# EAGLE board zeta2 (EAGLE 9.0.1)

Size 101.27 x 85.08 mm. Coordinates in mm from the lower left corner, seen from the top.
Outline: 0,0 101.27,0 101.27,85.08 0,85.08 0,0
Copper layers (1*16): Top 0.035mm / dielectric 1.5mm / Bottom 0.035mm
Design rules "default": minimum track width 6mil, minimum drill 0.35mm, track to track 6mil, track to pad 6mil, pad to pad 6mil, via to via 6mil, smd to smd 6mil, copper to edge 40mil, drill to drill 6mil, minimum pad ring 10mil, minimum via ring 8mil, stop-mask expansion 4mil, vias tented up to drill 0mil, thermal gap 10mil

## Footprints (pad centres in the part's own frame; a part is rotated, then mirrored left to right if it is on the bottom)
JST_B2B-PH_HEADER = drill 0.8 long: P1 1.075,0.048; P2 -0.925,0.048
JST_B3B-PH_HEADER = drill 0.8 long: P1 2.027,0.048; P2 0.028,0.048; P3 -1.972,0.048
C0603 = smd 1.1 x 1: 1 -0.85,0; 2 0.85,0
SMC_C = smd 2.4 x 2.4: + -2.5,0; - 2.5,0
SMC_A = smd 1.6 x 1.4: + -1.5,0; - 1.5,0
SOD80C = smd 1.4 x 1.8: A 1.7,0; C -1.7,0
MELF-MLL41 = smd 2.5 x 3: A 2.625,0; C -2.625,0
JST_B4B-PH_HEADER = drill 0.8 long: P1 2.98,0.048; P2 0.98,0.048; P3 -1.02,0.048; P4 -3.02,0.048
SOT23 = smd 1 x 1.4: 1 -0.95,-1.1; 2 0.95,-1.1; 3 0,1.1
SO20 = smd 0.6 x 2.2: 1 -5.715,-4.6; 2 -4.445,-4.6; 3 -3.175,-4.6; 4 -1.905,-4.6; 5 -0.635,-4.6; 6 0.635,-4.6; 7 1.905,-4.6; 8 3.175,-4.6; 9 4.445,-4.6; 10 5.715,-4.6; 11 5.715,4.6; 12 4.445,4.6; 13 3.175,4.6; 14 1.905,4.6; 15 0.635,4.6; 16 -0.635,4.6; 17 -1.905,4.6; 18 -3.175,4.6; 19 -4.445,4.6; 20 -5.715,4.6
SO16 = smd 0.66 x 2.032: 1 -4.445,-3.073; 2 -3.175,-3.073; 3 -1.905,-3.073; 4 -0.635,-3.073; 5 0.635,-3.073; 6 1.905,-3.073; 7 3.175,-3.073; 8 4.445,-3.073; 9 4.445,3.073; 10 3.175,3.073; 11 1.905,3.073; 12 0.635,3.073; 13 -0.635,3.073; 14 -1.905,3.073; 15 -3.175,3.073; 16 -4.445,3.073
SO-08 = smd 0.6 x 2.2: 1 -1.905,-2.6; 2 -0.635,-2.6; 3 0.635,-2.6; 4 1.905,-2.6; 5 1.905,2.6; 6 0.635,2.6; 7 -0.635,2.6; 8 -1.905,2.6
SOT-23 = smd 0.787 x 0.889: 1 0.025,-1.016; 2 -0.94,1.016; 3 0.991,1.016
MOTOR_DRIVER_FOOTPRINT = drill 0.9 pad 1.778: A_IN1 3.81,-5.08; A_IN2 3.81,-2.54; A_O1 -3.81,-5.08; A_O2 -3.81,-2.54; B_IN1 3.81,0; B_IN2 3.81,2.54; B_O1 -3.81,0; B_O2 -3.81,2.54; GND2 3.81,7.62; MODE 3.81,-7.62; VCC 3.81,5.08; VIN -3.81,5.08; VMM -3.81,-7.62 | drill 0.9 pad 1.778 square: GND1 -3.81,7.62
JP2 = drill 0.914 long: 1 -2.54,0; 2 0,0; 3 2.54,0
MOLEX_47346-0001 = smd 0.45 x 1.38: 1 -1.3,2.66; 2 -0.65,2.66; 3 0,2.66; 4 0.65,2.66; 5 1.3,2.66 | smd 1.475 x 2.1: SH1 -2.462,2.3; SH2 2.462,2.3 | smd 2.375 x 1.9: SH3 -2.913,0; SH6 2.913,0 | smd 1.175 x 1.9: SH4 -0.838,0; SH5 0.838,0
SOIC-8 = smd 0.66 x 2.032: 1 -1.905,-3.073; 2 -0.635,-3.073; 3 0.635,-3.073; 4 1.905,-3.073; 5 1.905,3.073; 6 0.635,3.073; 7 -0.635,3.073; 8 -1.905,3.073
FE20-2 = drill 0.914: 1 -24.13,1.27 | drill 0.914 octagon: 2 -24.13,-1.27; 3 -21.59,1.27; 4 -21.59,-1.27; 5 -19.05,1.27; 6 -19.05,-1.27; 7 -16.51,1.27; 8 -16.51,-1.27; 9 -13.97,1.27; 10 -13.97,-1.27; 11 -11.43,1.27; 12 -11.43,-1.27; 13 -8.89,1.27; 14 -8.89,-1.27; 15 -6.35,1.27; 16 -6.35,-1.27; 17 -3.81,1.27; 18 -3.81,-1.27; 19 -1.27,1.27; 20 -1.27,-1.27; 21 1.27,1.27; 22 1.27,-1.27; 23 3.81,1.27; 24 3.81,-1.27; 25 6.35,1.27; 26 6.35,-1.27; 27 8.89,1.27; 28 8.89,-1.27; 29 11.43,1.27; 30 11.43,-1.27; 31 13.97,1.27; 32 13.97,-1.27; 33 16.51,1.27; 34 16.51,-1.27; 35 19.05,1.27; 36 19.05,-1.27; 37 21.59,1.27; 38 21.59,-1.27; 39 24.13,1.27; 40 24.13,-1.27
7.0X5.0 = smd 2.2 x 1.4: 1 -3.2,-1.25; 2 3.2,-1.25; 3 3.2,1.25; 4 -3.2,1.25
R0603 = smd 1 x 1.1: 1 -0.85,0; 2 0.85,0
2512 = smd 1.8 x 3.2: 1 -2.8,0; 2 2.8,0
SJ_2 = smd 1.168 x 1.6: 1 -1.524,0; 2 0,0; 3 1.524,0
SOLDERJUMPER_REFLOW_NOPASTE = smd 1.168 x 1.6: 1 -0.762,0; 2 0.762,0
1X2-3.5MM = drill 1 pad 2.184: 1 1.8,0; 2 -1.7,0
QFN50P400X400X95-24N = smd 0.79 x 0.26: 1 -1.97,1.25; 2 -1.97,0.75; 3 -1.97,0.25; 4 -1.97,-0.25; 5 -1.97,-0.75; 6 -1.97,-1.25; 13 1.97,-1.25; 14 1.97,-0.75; 15 1.97,-0.25; 16 1.97,0.25; 17 1.97,0.75; 18 1.97,1.25 | smd 0.26 x 0.79: 7 -1.25,-1.97; 8 -0.75,-1.97; 9 -0.25,-1.97; 10 0.25,-1.97; 11 0.75,-1.97; 12 1.25,-1.97; 19 1.25,1.97; 20 0.75,1.97; 21 0.25,1.97; 22 -0.25,1.97; 23 -0.75,1.97; 24 -1.25,1.97
SOT23-8 = smd 0.4 x 1.2: 1 -0.975,-1.3; 2 -0.325,-1.3; 3 0.325,-1.3; 4 0.975,-1.3; 5 0.975,1.3; 6 0.325,1.3; 7 -0.325,1.3; 8 -0.975,1.3
MSOP10 = smd 0.3 x 1: 1 -1,-2.05; 2 -0.5,-2.05; 3 0,-2.05; 4 0.5,-2.05; 5 1,-2.05; 6 1,2.05; 7 0.5,2.05; 8 0,2.05; 9 -0.5,2.05; 10 -1,2.05
SOP65P490X95-8N = smd 1.4 x 0.45: 1 -2.2,0.975; 2 -2.2,0.325; 3 -2.2,-0.325; 4 -2.2,-0.975; 5 2.2,-0.975; 6 2.2,-0.325; 7 2.2,0.325; 8 2.2,0.975
LQFP48_7X7MM_0.5MMPP = smd 1.5 x 0.3: 1 -4.45,2.75; 2 -4.45,2.25; 3 -4.45,1.75; 4 -4.45,1.25; 5 -4.45,0.75; 6 -4.45,0.25; 7 -4.45,-0.25; 8 -4.45,-0.75; 9 -4.45,-1.25; 10 -4.45,-1.75; 11 -4.45,-2.25; 12 -4.45,-2.75; 25 4.45,-2.75; 26 4.45,-2.25; 27 4.45,-1.75; 28 4.45,-1.25; 29 4.45,-0.75; 30 4.45,-0.25; 31 4.45,0.25; 32 4.45,0.75; 33 4.45,1.25; 34 4.45,1.75; 35 4.45,2.25; 36 4.45,2.75 | smd 0.3 x 1.5: 13 -2.75,-4.45; 14 -2.25,-4.45; 15 -1.75,-4.45; 16 -1.25,-4.45; 17 -0.75,-4.45; 18 -0.25,-4.45; 19 0.25,-4.45; 20 0.75,-4.45; 21 1.25,-4.45; 22 1.75,-4.45; 23 2.25,-4.45; 24 2.75,-4.45; 37 2.75,4.45; 38 2.25,4.45; 39 1.75,4.45; 40 1.25,4.45; 41 0.75,4.45; 42 0.25,4.45; 43 -0.25,4.45; 44 -0.75,4.45; 45 -1.25,4.45; 46 -1.75,4.45; 47 -2.25,4.45; 48 -2.75,4.45
LPCC-16 = smd 0.45 x 0.3: 1 -1.275,0.75; 2 -1.275,0.25; 3 -1.275,-0.25; 4 -1.275,-0.75; 9 1.275,-0.75; 10 1.275,-0.25; 11 1.275,0.25; 12 1.275,0.75 | smd 0.3 x 0.45: 5 -0.75,-1.275; 6 -0.25,-1.275; 7 0.25,-1.275; 8 0.75,-1.275; 13 0.75,1.275; 14 0.25,1.275; 15 -0.25,1.275; 16 -0.75,1.275
BMP085 = smd 1.67 x 0.8: 1 -2.065,1.27; 2 -2.065,0; 3 -2.065,-1.27; 5 2.065,-1.27; 6 2.065,0; 7 2.065,1.27 | smd 0.8 x 1.67: 4 0,-2.065 | smd 0.8 x 2.5: 8 0,1.65
DC-DC-STEP-DOWN-MP2307 = drill 1.2 pad 2 square: IN+ -7.747,-4.699; IN- -7.747,4.699; OUT+ 7.747,-4.699; OUT- 7.747,4.699

## Placement (x,y rotation side)
3V3_OUT  JST-PH_2-PIN_HEADER  [JST_B2B-PH_HEADER]  3.81,55.88 270 top
5V_OUT  JST-PH_2-PIN_HEADER  [JST_B2B-PH_HEADER]  3.81,63.5 270 top
8V_OUT  JST-PH_2-PIN_HEADER  [JST_B2B-PH_HEADER]  3.81,40.64 270 top
ANALOG1  JST-PH_3-PIN_HEADER  [JST_B3B-PH_HEADER]  97.79,43.18 90 top
ANALOG2  JST-PH_3-PIN_HEADER  [JST_B3B-PH_HEADER]  97.79,52.07 90 top
C1  0.22µF  [C0603]  36.83,48.26 90 top
C2  4.7µF  [C0603]  27.94,52.07 0 top
C3  0.1µF  [C0603]  96.52,8.89 0 top
C4  10µF  [C0603]  44.45,7.62 0 top
C5  0.1µF  [C0603]  43.18,16.51 0 top
C6  0.1µF  [C0603]  43.18,12.7 0 top
C7  0.1µF  [C0603]  31.75,6.35 0 top
C8  4.7µF  [C0603]  25.4,29.21 0 top
C9  47µF  [SMC_C]  93.98,48.26 90 top
C10  0.1µF  [SMC_A]  74.7,34.29 0 top
C11  100µF  [SMC_C]  68.58,29.21 0 top
C12  47µF  [SMC_C]  80.01,62.23 0 top
C13  0.1µF  [SMC_A]  74.7,21.59 0 top
C14  100µF  [SMC_C]  58.42,34.29 0 top
C15  100nF  [C0603]  81.28,22.86 0 top
C16  0.1µF  [C0603]  85.09,35.56 0 top
C17  2,2nF  [C0603]  81.28,12.7 0 top
C18  0.1µF  [C0603]  81.28,7.62 0 top
C19  0.1µF  [C0603]  87.63,6.35 0 top
C20  0.1µF  [C0603]  95.25,35.56 0 top
C21  0.1µF  [C0603]  95.25,30.48 0 top
C22  4.7µF  [C0603]  95.25,25.4 0 top
C23  10µF  [C0603]  95.25,20.32 0 top
C24  0.1µF  [C0603]  95.25,15.24 0 top
C25  10µF  [C0603]  26.67,26.67 0 top
C26  0.1µF  [C0603]  19.05,26.67 0 top
C27  47µF  [SMC_C]  54.61,27.94 0 top
C28  10nF  [C0603]  19.05,7.62 0 top
C29  10nF  [C0603]  24.13,7.62 0 top
C30  10nF  [C0603]  46.99,22.86 0 top
C31  10nF  [C0603]  54.61,22.86 0 top
C32  0.1µF  [C0603]  46.99,17.78 0 top
C33  10nF  [C0603]  36.83,6.35 0 top
C34  47µF  [SMC_C]  7.62,40.64 90 bottom
C35  0.1µF  [C0603]  3.81,24.13 0 top
C36  10µF  [C0603]  90.17,35.56 0 top
C37  10µF  [C0603]  90.17,30.48 0 top
C38  10nF  [C0603]  90.17,20.32 0 top
C39  10nF  [C0603]  90.17,15.24 0 top
C40  10nF  [C0603]  90.17,10.16 0 top
C41  10nF  [C0603]  43.18,34.29 0 top
C42  0.1µF  [C0603]  85.09,25.4 0 top
C43  47µF  [SMC_C]  17.78,77.47 0 top
C44  0.1µF  [C0603]  6.35,55.88 0 bottom
D2  [SOD80C]  30.48,58.42 0 top
D3  1N4004 SMD  [MELF-MLL41]  19.05,82.55 0 bottom
EX_IO  JST-PH_3-PIN_HEADER  [JST_B3B-PH_HEADER]  69.85,40.64 0 top
FAN  JST-PH_2-PIN_HEADER  [JST_B2B-PH_HEADER]  3.81,81.28 270 top
HALL_SENSOR_A1120  JST-PH_3-PIN_HEADER  [JST_B3B-PH_HEADER]  97.79,60.96 90 top
I2C  JST-PH_4-PIN_HEADER  [JST_B4B-PH_HEADER]  34.29,40.64 0 top
IC1  MAX6520  [SOT23]  11.43,73.66 0 top
IC2  L293DD  [SO20]  87.63,71.12 0 top
IC3  L293DD  [SO20]  85.09,53.34 0 top
IC4  ULN2003AD  [SO16]  25.4,64.77 0 top
IRF7401  [SO-08]  12.7,64.77 0 top
IRLML2502  [SOT-23]  11.43,80.01 0 bottom
J_MOTOR_DRIVER_1  MOTOR_DRIVER  [MOTOR_DRIVER_FOOTPRINT]  -115.57,-1014.73 0 top  (outside the outline)
JP3  [JP2]  38.1,72.39 0 top
JP4  [JP2]  38.1,68.58 0 top
LED  JST-PH_3-PIN_HEADER  [JST_B3B-PH_HEADER]  97.79,80.01 90 top
MICRO_USB_B  47346-0001  [MOLEX_47346-0001]  48.26,40.64 0 top
MOTOR_LEFT  JST-PH_4-PIN_HEADER  [JST_B4B-PH_HEADER]  83.82,40.64 0 top
MOTOR_RIGHT  JST-PH_4-PIN_HEADER  [JST_B4B-PH_HEADER]  82.55,81.28 180 top
ONE_WIRE  JST-PH_3-PIN_HEADER  [JST_B3B-PH_HEADER]  60.96,40.64 0 top
PCA9306  [SOIC-8]  35.56,48.26 270 bottom
PI_HEADER  [FE20-2]  49.53,80.01 0 top
Q2  [SOT23]  73.66,63.5 0 top
Q4  [SOT23]  71.12,69.85 0 top
Q5  [SOT23]  27.94,7.62 0 top
Q6  [SOT23]  92.71,60.96 0 top
Q7  [SOT23]  66.04,72.39 0 top
Q8  [SOT23]  91.44,44.45 0 top
Q9  8MHz  [7.0X5.0]  62.23,66.04 0 bottom
R1  500  [R0603]  5.08,15.24 0 top
R2  500  [R0603]  3.81,10.16 0 top
R5  500R  [R0603]  60.96,11.43 0 top
R6  500R  [R0603]  66.04,11.43 0 top
R7  100k  [R0603]  7.62,7.62 0 top
R8  100k  [R0603]  63.5,16.51 0 top
R9  100k  [R0603]  13.97,27.94 0 top
R10  100k  [R0603]  13.97,22.86 0 top
R11  500  [R0603]  13.97,10.16 0 top
R12  100k  [R0603]  69.85,16.51 0 top
R13  500R  [R0603]  55.88,11.43 0 top
R14  100k  [R0603]  49.53,11.43 0 top
R15  5k  [R0603]  80.01,33.02 0 top
R16  5k  [R0603]  80.01,27.94 0 top
R17  0.1/1% (PT2512FK-070R1L)  [2512]  17.78,72.39 0 bottom
R18  0.1/1% (PT2512FK-070R1L)  [2512]  26.67,72.39 0 bottom
R19  22R  [R0603]  35.56,34.29 0 top
R20  22R  [R0603]  35.56,29.21 0 top
R21  22R  [R0603]  7.62,27.94 0 top
R22  100k  [R0603]  88.9,25.4 0 top
R23  5k  [R0603]  41.91,29.21 0 top
R24  5k  [R0603]  41.91,24.13 0 top
R25  220R  [R0603]  6.73,71.37 0 bottom
R26  220R  [R0603]  6.73,69.34 0 bottom
R27  220R  [R0603]  94.36,80.01 0 bottom
R28  220R  [R0603]  94.36,82.04 0 bottom
R29  220R  [R0603]  63.5,24.13 0 top
R30  4k7  [R0603]  74.93,52.07 0 top
R31  100k  [R0603]  76.2,38.1 0 top
R32  100k  [R0603]  74.93,17.78 0 top
R33  100k  [R0603]  35.56,12.7 0 top
R35  100k  [R0603]  20.32,33.02 0 top
RGB_LED  JST-PH_4-PIN_HEADER  [JST_B4B-PH_HEADER]  3.81,72.39 270 top
SJ2  [SJ_2]  60.96,53.34 0 top
SJ3  [SOLDERJUMPER_REFLOW_NOPASTE]  36.83,24.13 0 top
SJ4  [SOLDERJUMPER_REFLOW_NOPASTE]  36.83,17.78 0 top
SJ5  [SOLDERJUMPER_REFLOW_NOPASTE]  76.2,12.7 0 top
SUPPLY_IN  TERMBLOCK_1X2-3.5MM  [1X2-3.5MM]  3.81,48.26 270 top
TFMINI  JST-PH_4-PIN_HEADER  [JST_B4B-PH_HEADER]  97.79,71.12 90 top
U1  MPU-6050  [QFN50P400X400X95-24N]  53.34,52.07 0 bottom
U2  INA219  [SOT23-8]  26.67,72.39 0 top
U3  ADS1115  [MSOP10]  68.58,54.61 0 top
U4  INA219  [SOT23-8]  17.78,72.39 0 top
U5  DS18B20U+  [SOP65P490X95-8N]  66.04,59.69 0 top
U$1  STM32F103C8T6  [LQFP48_7X7MM_0.5MMPP]  49.53,66.04 0 bottom
U$2  HMC5883L  [LPCC-16]  46.99,57.15 0 bottom
U$3  BMP085  [BMP085]  43.18,52.07 0 bottom
U$10  DC-DC-STEP-DOWN-MP2307  [DC-DC-STEP-DOWN-MP2307]  15.24,48.26 90 top

## Library data of the parts
3V3_OUT 5V_OUT 8V_OUT ANALOG1 ANALOG2 EX_IO FAN HALL_SENSOR_A1120 I2C LED MOTOR_LEFT MOTOR_RIGHT ONE_WIRE PCA9306 RGB_LED TFMINI = srg
C1-C44 = rcl; SPICEPREFIX: C
D2 D3 = diode
IC1 = maxim; MF: MAXIM; MPN: MAX6520EUR-T; OC_FARNELL: unknown; OC_NEWARK: 02J4586
IC2 IC3 = st-microelectronics; OC_FARNELL: unknown
IC4 = uln-udn
IRF7401 = transistor-power
IRLML2502 = zetex; OC_FARNELL: unknown; OC_NEWARK: unknown
J_MOTOR_DRIVER_1 = Pololu Encoder and Motor Driver
JP3 JP4 SJ2 = jumper
MICRO_USB_B = 47346-0001; AVAILABILITY: Good; DESCRIPTION: Micro-USB B Receptacle with Flange, Bottom Mount, SMT, Lead-Free; MF: Molex; MP: 47346-0001; PACKAGE: None; PRICE: 0.70 USD
PI_HEADER = con-lsta; OC_FARNELL: unknown; OC_NEWARK: unknown
Q2 Q4-Q8 = semicon-smd-ipc
Q9 = crystal-geyer_V1_0
R1 R2 R5-R16 R19-R33 R35 = rcl; SPICEPREFIX: R
R17 R18 SJ3-SJ5 SUPPLY_IN = microbuilder
U1 = MPU-6050; AVAILABILITY: Good; DESCRIPTION: 3-axis gyroscope, 3-axis accelerometer in a 4x4x0.9 housing; MF: TDK; MP: MPU-6050; PACKAGE: QFN-24 InvenSense; PRICE: 5.12 USD
U2 U4 = INA219; AVAILABILITY: Unavailable; DESCRIPTION: the ina219 is a high-side current shunt and power monitor with an i2c interface. the ina219 monitors both shunt drop ...; MF: Texas Instruments; MP: INA219; PACKAGE: None; PRICE: None
U3 = ADS1115; AVAILABILITY: Unavailable; DESCRIPTION: 16-Bit ADC with Integrated MUX PGA Comparator Oscillator and Reference; MF: Texas Instruments; MP: ADS1115; PACKAGE: XFQFN-10 Texas Instruments; PRICE: None
U5 = DS18B20U_; AVAILABILITY: Unavailable; DESCRIPTION: Date Code: 1043+; RoHS Compliant: Yes;; MF: Maxim; MP: DS18B20U+; PACKAGE: TSSOP-8 Chip Coolers; PRICE: None
U$1 = STM32F103C8T6; AVAILABILITY: Good; DESCRIPTION: Mainstream Performance line, ARM Cortex-M3 MCU with 64 Kbytes Flash, 72 MHz CPU, motor control, USB and CAN; MF: STMicroelectronics; MP: STM32F103C8T6; PACKAGE: LQFP-48 STMicroelectronics; PRICE: 3.83 USD
U$2 = HMC5883L; AVAILABILITY: Unavailable; DESCRIPTION: Digital Compass +/- 0.8g, Lcc-16; MF: Honeywell; MP: HMC5883L-T; PACKAGE: LCC-16 Honeywell; PRICE: None
U$3 = BMP085; AVAILABILITY: Unavailable; MF: Bosch Sensortec; MP: BMP085; PACKAGE: CLCC-8 Bosch Sensortec; PRICE: None
U$10 = diy-modules

## Nets
+3V3: 3V3_OUT.P1 C4.1 C5.1 C6.1 C7.1 C15.1 C18.1 C20.1 C22.1 C23.1 C24.1 C25.1 C26.1 C32.1 C33.1 C38.1 C39.1 C40.1 C44.1 HALL_SENSOR_A1120.P1 IC1.2 JP3.1 JP4.1 ONE_WIRE.P1 PCA9306.1 R15.1 R16.1 R30.2 R31.1 SJ2.1 U1.8 U1.13 U2.4 U3.8 U4.4 U4.7 U5.8 U$1.9 U$1.24 U$1.36 U$1.48 U$2.2 U$2.4 U$2.13 U$3.3 U$3.4
+5V: 5V_OUT.P1 ANALOG1.P1 ANALOG2.P1 C3.1 C8.1 C10.+ C11.+ C13.+ C14.+ C19.1 C34.+ C42.1 EX_IO.P1 IC1.1 IC2.20 IC3.20 IC4.9 PI_HEADER.38 PI_HEADER.40 Q2.2 Q5.2 R8.2 R9.2 R10.2 R12.2 R18.1 SJ2.3 SJ5.1 TFMINI.P1 U4.2
+8V: 8V_OUT.P1 C9.+ C12.+ C35.1 C41.1 C43.+ D3.C FAN.P1 IC2.10 IC3.10 R17.1 U2.2
A_RDY: U3.2
ANALOG_3V3: HALL_SENSOR_A1120.P2 U$1.10
BMP_EOC: U$3.2
BOOT0: JP3.2 PI_HEADER.29 R31.2 U$1.44
BOOT1: JP4.2 PI_HEADER.27 R33.1 U$1.20
CONV_5V: R18.2 U4.1 U$10.OUT+
GND: 3V3_OUT.P2 5V_OUT.P2 8V_OUT.P2 ANALOG1.P3 ANALOG2.P3 C2.2 C3.2 C4.2 C5.2 C6.2 C7.2 C8.2 C9.- C10.- C11.- C12.- C13.- C14.- C15.2 C16.2 C17.2 C18.2 C19.2 C20.2 C21.2 C22.2 C23.2 C24.2 C25.2 C26.2 C27.- C32.2 C33.2 C34.- C35.2 C36.1 C37.1 C38.2 C39.2 C40.2 C42.2 C43.- C44.2 D2.A EX_IO.P3 HALL_SENSOR_A1120.P3 I2C.P4 IC1.3 IC2.4 IC2.5 IC2.6 IC2.7 IC2.14 IC2.15 IC2.16 IC2.17 IC3.4 IC3.5 IC3.6 IC3.7 IC3.14 IC3.15 IC3.16 IC3.17 IC4.8 IRF7401.5 IRF7401.6 IRF7401.7 IRF7401.8 IRLML2502.2 JP3.3 JP4.3 LED.P3 MICRO_USB_B.5 MICRO_USB_B.SH1 MICRO_USB_B.SH2 MICRO_USB_B.SH3 MICRO_USB_B.SH4 MICRO_USB_B.SH5 MICRO_USB_B.SH6 ONE_WIRE.P3 PCA9306.4 PI_HEADER.1 PI_HEADER.8 PI_HEADER.12 PI_HEADER.15 PI_HEADER.22 PI_HEADER.28 PI_HEADER.31 PI_HEADER.36 Q4.2 Q6.2 Q7.2 Q8.2 R7.1 R14.1 R22.2 R32.1 R33.2 RGB_LED.P4 TFMINI.P4 U1.1 U1.9 U1.11 U1.18 U2.3 U2.7 U2.8 U3.1 U3.3 U3.5 U3.7 U4.3 U4.8 U5.4 U$1.8 U$1.23 U$1.35 U$1.47 U$2.9 U$2.11 U$3.1 U$3.8 U$10.IN+ U$10.OUT-
HMC_RDY: U$2.15
LED_1: IC4.4
LED_2: IC4.3
LED_B: IC4.5
LED_G: IC4.6
LED_R: IC4.7
M_DIR_1: R1.1 R11.1 U$1.15 U$1.17
M_DIR_2: R5.1 R13.1
MPU_INT: U1.12
N$1: IC2.9 IC2.12 Q7.3 R9.1
N$2: C1.2 U$2.12
N$3: C1.1 U$2.8
N$4: C2.1 U$2.10
N$5: IC2.2 IC2.19 Q2.3 R7.2
N$6: IC3.9 IC3.12 Q8.3 R8.1
N$7: IC3.2 IC3.19 Q5.3 R14.2
N$8: IC2.1 IC2.11 Q4.3 R10.1
N$9: IC3.1 IC3.11 Q6.3 R12.1
N$10: Q2.1 R1.2
N$11: Q7.1 R11.2
N$12: Q4.1 R2.2
N$13: Q5.1 R5.2
N$14: Q6.1 R6.2
N$15: Q8.1 R13.2
N$16: C17.1 U1.20
N$17: C29.1 IC2.13 MOTOR_RIGHT.P3
N$18: C29.2 IC2.18 MOTOR_RIGHT.P4
N$19: C21.1 U1.10
N$20: C28.2 IC2.8 MOTOR_RIGHT.P2
N$21: C28.1 IC2.3 MOTOR_RIGHT.P1
N$23: C31.1 IC3.13 MOTOR_LEFT.P3
N$24: C31.2 IC3.18 MOTOR_LEFT.P4
N$25: C30.2 IC3.8 MOTOR_LEFT.P2
N$26: C30.1 IC3.3 MOTOR_LEFT.P1
N$27: IC4.10 R29.1
N$28: C36.2 Q9.1 U$1.6
N$29: C37.2 Q9.3 U$1.5
N$30: IRLML2502.3 R21.2
N$31: IC4.11 R25.1
N$32: R20.1 U$1.32
N$33: R19.1 U$1.33
N$34: R22.1 U$1.2
N$35: PI_HEADER.37 SJ3.2
N$36: PI_HEADER.35 SJ4.2
N$37: IC4.12 R26.1
N$38: I2C.P1 PCA9306.7 PCA9306.8 R23.2 R24.2 SJ2.2
N$39: I2C.P2 PCA9306.6 R23.1
N$40: I2C.P3 PCA9306.5 R24.1
N$41: IC4.13 R27.1
N$42: IC4.14 R28.1
N$43: MICRO_USB_B.4 R32.2
N$44: LED.P1 R28.2
N$45: R29.2 RGB_LED.P3
N$46: R25.2 RGB_LED.P2
N$47: R26.2 RGB_LED.P1
N$48: LED.P2 R27.2
N$49: MICRO_USB_B.1 SJ5.2
N$50: ANALOG1.P2 U3.4
N$51: ANALOG2.P2 U3.6
N$55: C41.2 D3.A FAN.P2 IRLML2502.1
N$56: D2.C IRF7401.4 R35.1
N$60: IRF7401.1 IRF7401.2 IRF7401.3 SUPPLY_IN.1
NRST: PI_HEADER.26 U$1.7
PIN_OUT: EX_IO.P2 U$1.28
PWM_FAN: R21.1
PWM_M_EN_1: R2.1 U$1.16
PWM_M_EN_2: R6.1 U$1.18
S_DIR: U$1.14
S_PWM_SPEED: U$1.19
SCL: PCA9306.2 R15.2 SJ4.1 U1.23 U2.5 U3.10 U4.5 U$1.42 U$2.1 U$3.6
SDA: PCA9306.3 R16.2 SJ3.1 U1.24 U2.6 U3.9 U4.6 U$1.43 U$2.16 U$3.7
SWCLK: PI_HEADER.20
SWDCLK: U$1.37
SWDIO: PI_HEADER.24 U$1.34
TEMPERATURE: ONE_WIRE.P2 R30.1 U5.1
USART1_RX: TFMINI.P3 U$1.31
USART1_TX: TFMINI.P2 U$1.30
USART2_RX: PI_HEADER.34 U$1.13
USART2_TX: PI_HEADER.32 U$1.12
USB_DM: MICRO_USB_B.2 R20.2
USB_DP: MICRO_USB_B.3 R19.2
V+: C16.1 C27.+ R17.2 R35.2 SUPPLY_IN.2 U2.1 U$10.IN-

## Tracks (layer width: path | path; a pad name or v marks a point on that pad's centre or on a via)
+3V3  (45 unrouted)
+5V  (29 unrouted)
+8V  (11 unrouted)
ANALOG_3V3  (1 unrouted)
BOOT0  (3 unrouted)
BOOT1  (3 unrouted)
CONV_5V  (2 unrouted)
GND  (124 unrouted)
M_DIR_1  (3 unrouted)
M_DIR_2  (1 unrouted)
N$1  (3 unrouted)
N$2  (1 unrouted)
N$3  (1 unrouted)
N$4  (1 unrouted)
N$5  (3 unrouted)
N$6  (3 unrouted)
N$7  (3 unrouted)
N$8  (3 unrouted)
N$9  (3 unrouted)
N$10  (1 unrouted)
N$11  (1 unrouted)
N$12  (1 unrouted)
N$13  (1 unrouted)
N$14  (1 unrouted)
N$15  (1 unrouted)
N$16  (1 unrouted)
N$17  (2 unrouted)
N$18  (2 unrouted)
N$19  (1 unrouted)
N$20  (2 unrouted)
N$21  (2 unrouted)
N$23  (2 unrouted)
N$24  (2 unrouted)
N$25  (2 unrouted)
N$26  (2 unrouted)
N$27  (1 unrouted)
N$28  (2 unrouted)
N$29  (2 unrouted)
N$30  (1 unrouted)
N$31  (1 unrouted)
N$32  (1 unrouted)
N$33  (1 unrouted)
N$34  (1 unrouted)
N$35  (1 unrouted)
N$36  (1 unrouted)
N$37  (1 unrouted)
N$38  (5 unrouted)
N$39  (2 unrouted)
N$40  (2 unrouted)
N$41  (1 unrouted)
N$42  (1 unrouted)
N$43  (1 unrouted)
N$44  (1 unrouted)
N$45  (1 unrouted)
N$46  (1 unrouted)
N$47  (1 unrouted)
N$48  (1 unrouted)
N$49  (1 unrouted)
N$50  (1 unrouted)
N$51  (1 unrouted)
N$55  (3 unrouted)
N$56  (2 unrouted)
N$60  (3 unrouted)
NRST  (1 unrouted)
PIN_OUT  (1 unrouted)
PWM_M_EN_1  (1 unrouted)
PWM_M_EN_2  (1 unrouted)
SCL  (9 unrouted)
SDA  (9 unrouted)
SWDIO  (1 unrouted)
TEMPERATURE  (2 unrouted)
USART1_RX  (1 unrouted)
USART1_TX  (1 unrouted)
USART2_RX  (1 unrouted)
USART2_TX  (1 unrouted)
USB_DM  (1 unrouted)
USB_DP  (1 unrouted)
V+  (6 unrouted)